# Allegro board SENTINEL_FALL_V01_02APR_2130.brd
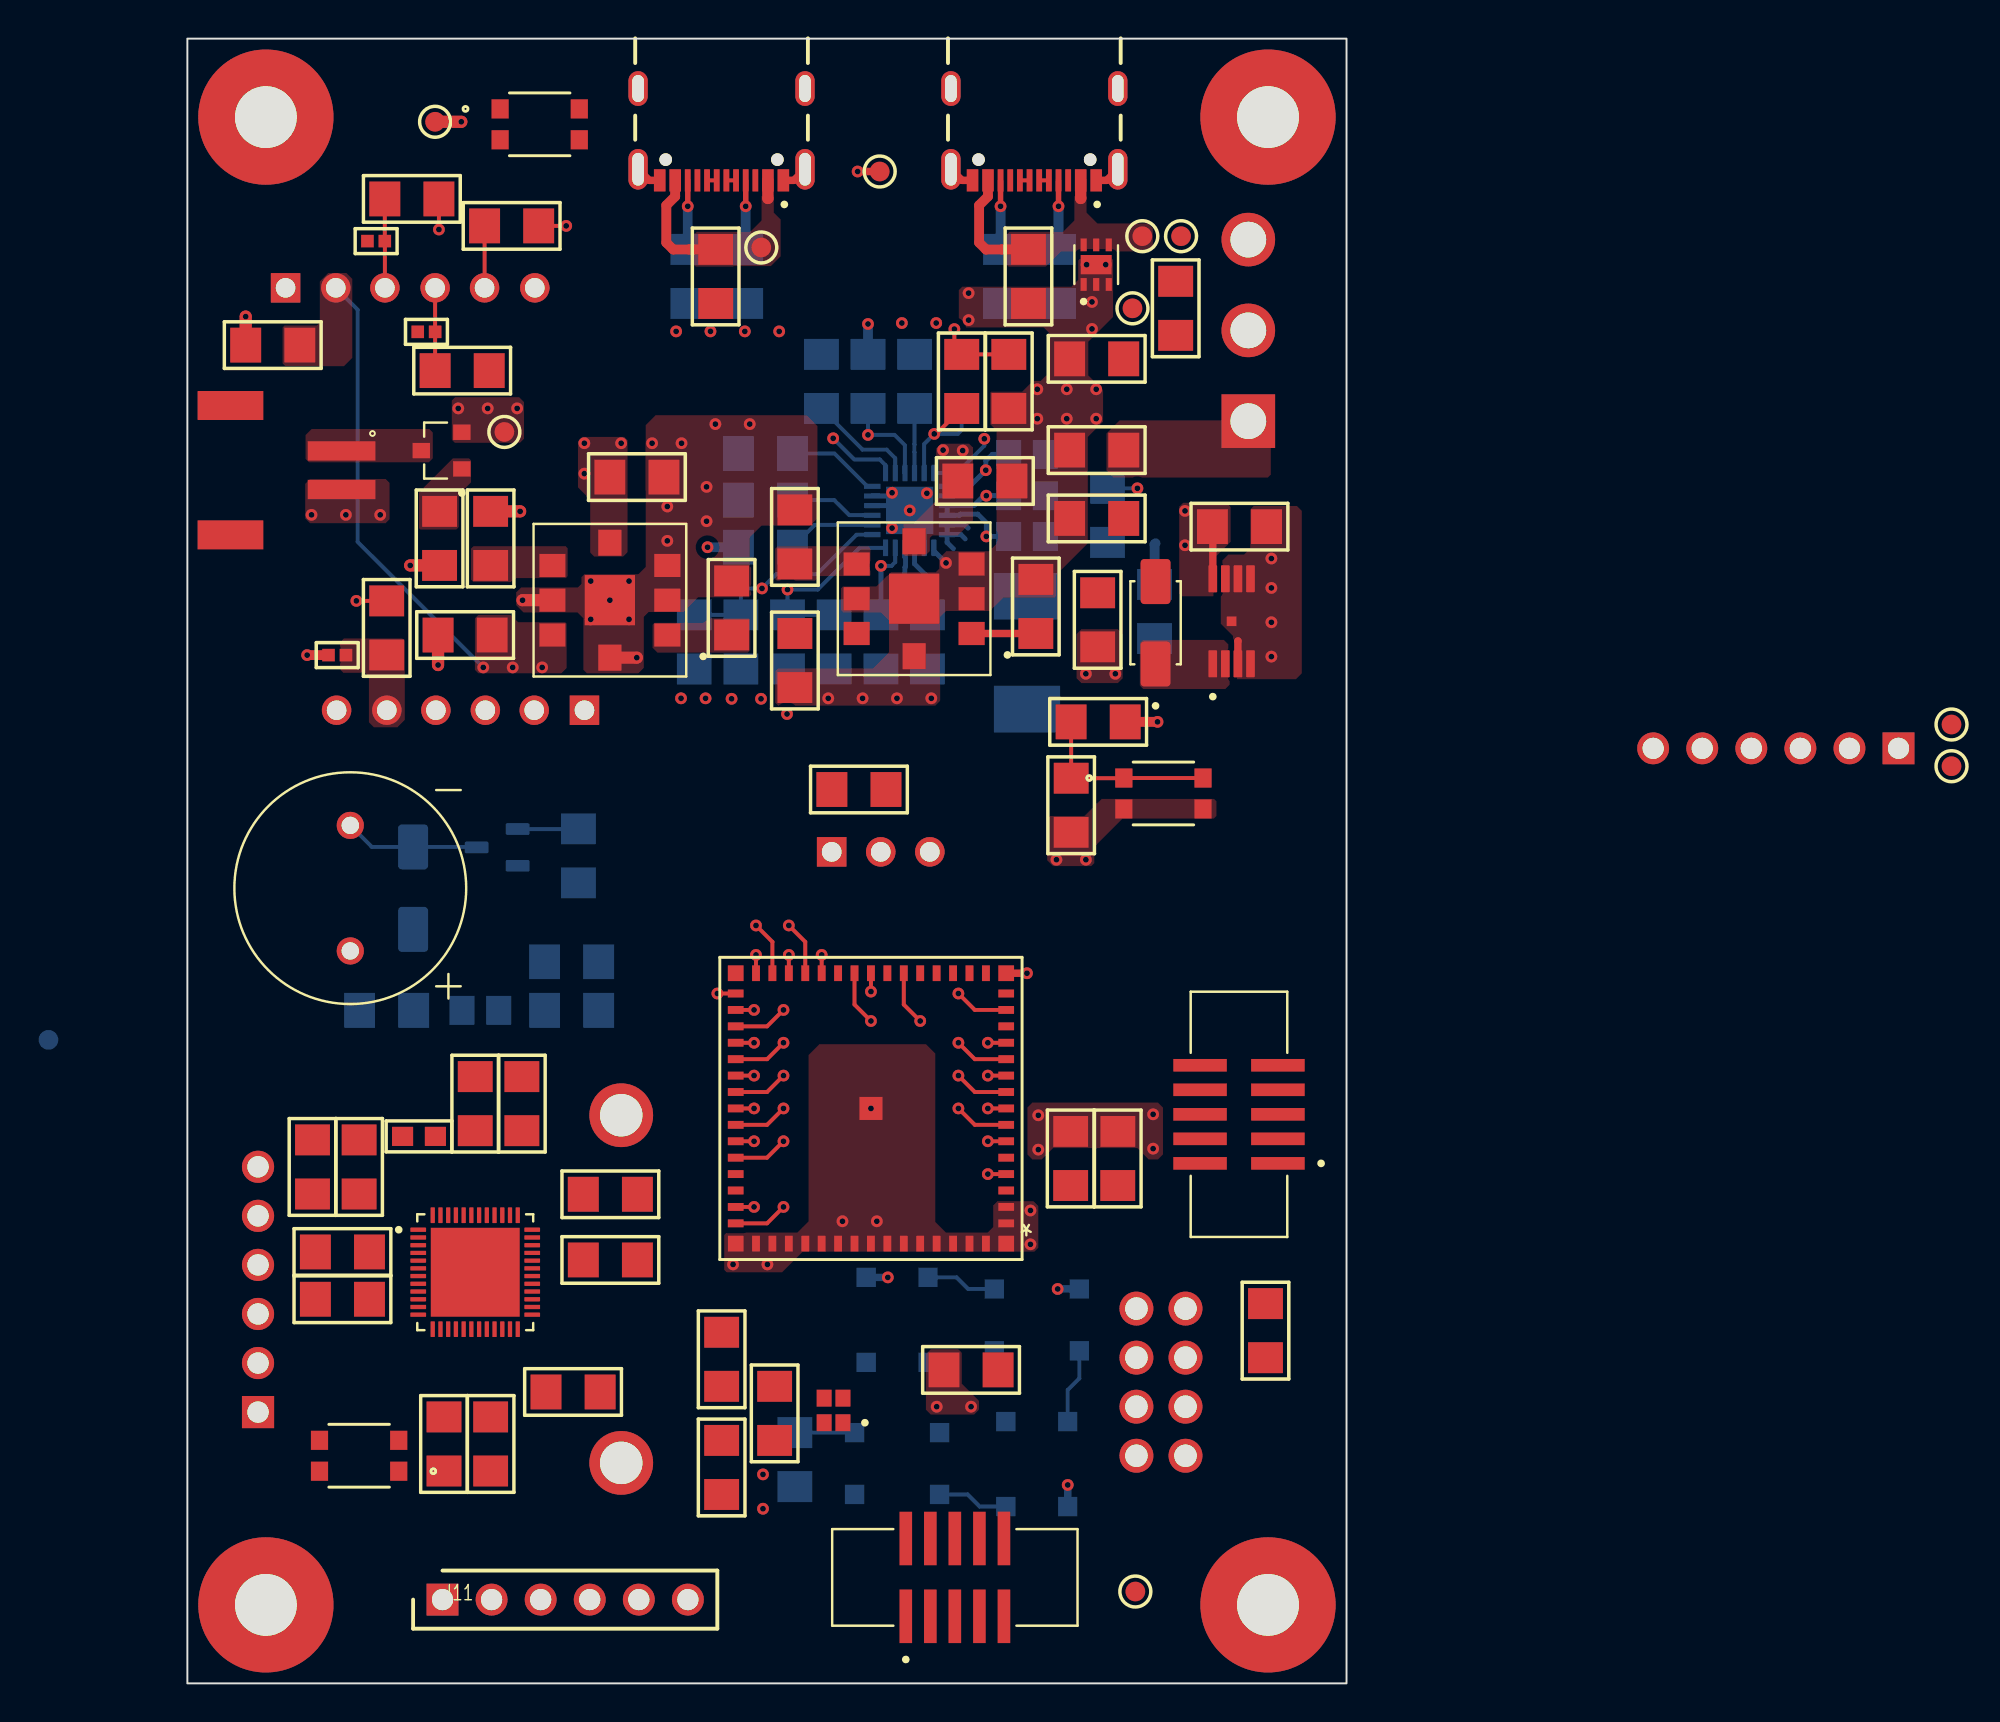
[diagram p0: board, top side]
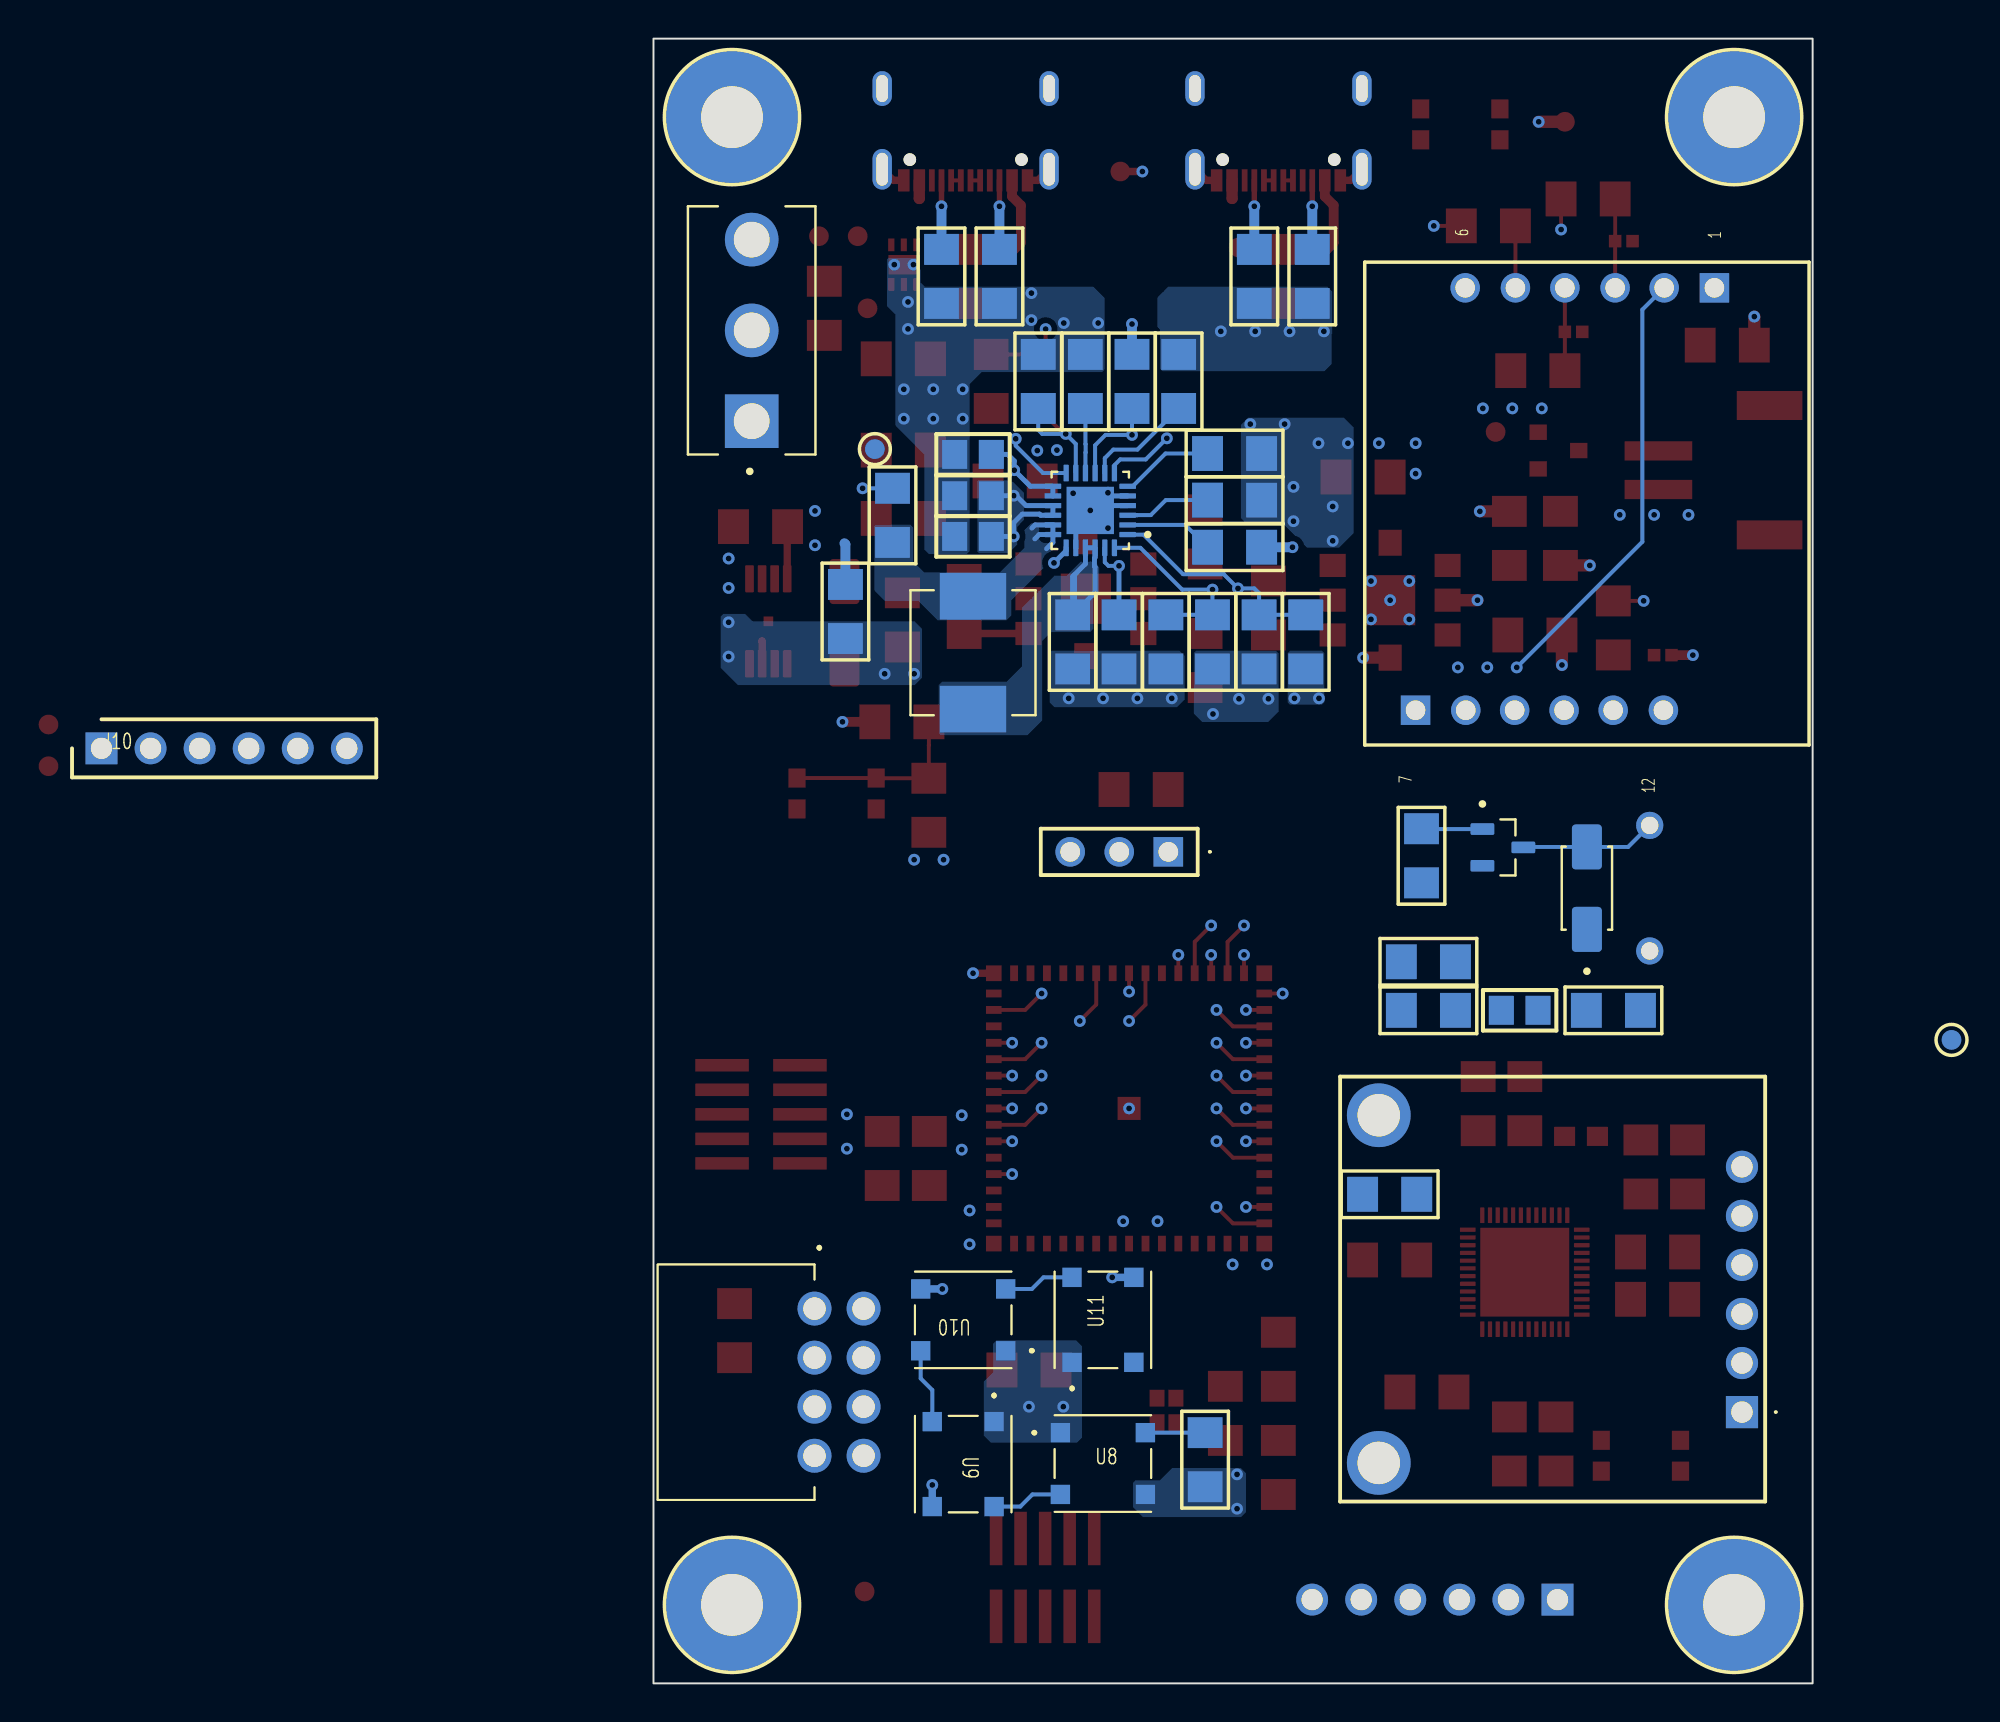
[diagram p1: board, bottom side, seen from below]

Outline 60 x 85.16 mm; copper layers: TOP, BOTTOM. Coordinates in mm from the lower left corner of the outline.
Outline path: rectangle 0,0 60,85.16

## Design rules (mm)
constraint set DEFAULT: min track width 0.203

## Placement (name value [footprint] x y rotation side)
C1  10uF  [C1206]  43.54 72.85 270 top
C2  1uF  [C1206]  35.9 53.92 270 bottom
C3  4.7uF  [C1206]  47.07 63.85 180 top
C4  10uF  [C1206]  38.3 53.92 90 bottom
C5  100nF  [C1206]  47.62 60.48 90 bottom
C6  4.7uF  [C1206]  47.07 68.58 180 top
C7  22uF  [C0805]  43.46 61.49 0 bottom
C8  22uF  [C0805]  43.46 59.39 0 bottom
C9  22uF  [C0805]  43.46 63.63 0 bottom
C10  4.7uF  [C1206]  40.08 67.41 90 bottom
C11  10uF  [C1206]  41.28 62.26 180 top
C12  10uF  [C1206]  23.27 62.46 180 top
C13  47uF  [C1206]  31.45 52.96 270 top
C14  47uF  [C1206]  14.38 54.28 180 top
C15  10uF  [C1206]  54.46 59.89 0 top
C16  100nF  [C1206]  50.06 55.5 270 bottom
C17  1uF  [C1206]  47.12 55.07 270 top
C18  10uF  [C1206]  45.72 27.18 270 top
C20  10uF  [C1206]  48.16 27.18 270 top
C21  10uF  [C1206]  4.42 69.29 0 top
C23  10uF  [C1206]  8.89 26.74 90 top
C24  10uF  [C1206]  19.96 15.09 0 top
C25  100nF  [C1206]  21.89 25.32 0 bottom
C26  100nF  [C1206]  6.48 26.74 90 top
C27  100nF  [C1206]  21.89 25.32 0 top
C28  100nF  [C1206]  8.03 19.89 180 top
C29  2.2uF  [C1206]  10.31 34.85 180 bottom
C30  100nF  [C1206]  13.28 12.4 90 top
C31  2.2uF  [C1206]  21.89 21.92 0 top
C32  10nF  [C1206]  19.89 37.36 0 bottom
C33  18pF  [C1206]  19.89 34.85 0 bottom
C35  18pF  [C1206]  27.65 11.18 270 top
C36  18pF  [C1206]  27.65 16.78 90 top
C37  10uF  [C1206]  27.34 72.85 270 top
C38  10uF  [C1206]  45.75 45.47 90 top
C39  10uF  [C1206]  47.07 60.32 0 top
C71  10uF  [C1206]  40.56 16.23 0 top
C72  10uF  [C1206]  34.76 46.28 180 top
D1  DIODE  [DIOM5226X230N]  50.11 54.91 90 top
D2  DIODE  [DIOM5226X230N]  11.68 41.17 90 bottom
FB1  120R, 0.2A  [F0805]  15.16 34.85 0 bottom
J1  USB4105-GF-A  [GCT_USB4105-GF-A]  43.84 82.58 180 top
J5  2X5 HDR JLINK  [CNC_3220-10-0300-00]  54.43 29.46 90 top
J6  2X5 HDR JLINK  [CNC_3220-10-0300-00]  39.73 5.49 0 top
J7  HEADER 2/SM_5  [JST_S2B-PH-SM4-TB]  7.98 62.81 90 top
J8  USB4105-GF-A  [GCT_USB4105-GF-A]  27.65 82.58 180 top
J9  1X3 HDR  [RS103G]  33.35 43.05 180 bottom
J10  PH1-06-UA  [HDRV6W64P0X254_1X6_1524X250X952P]  88.57 48.41 180 bottom
J11  PH1-06-UA  [HDRV6W64P0X254_1X6_1524X250X952P]  13.21 4.34 0 top
L1  1uH  [IND_IHLP2525CZER1R0M01]  43.46 53.37 90 bottom
L2  4.7uH  [L0603]  11.99 28.32 0 top
MOSFET2  SSM3J332R  [SOT95P240X88-3N]  13.16 63.83 90 top
NOREF  -  []  0 10.16 0 top
NOREF#2  -  []  60 0 90 top
R2  10K  [R1206]  42.09 72.85 270 bottom
R3  10K  [R1206]  45.09 72.85 270 bottom
R4  4K7  [R1206]  29.92 58.83 0 bottom
R5  4K7  [R1206]  35.23 67.41 270 bottom
R6  4K7  [R1206]  28.65 53.92 90 bottom
R7  4K7  [R1206]  31.06 53.92 90 bottom
R8  4K7  [R1206]  26.24 53.92 270 bottom
R9  4K7  [R1206]  33.48 53.92 270 bottom
R10  0R  [R1206]  32.82 67.41 90 bottom
R11  1M  [R1206]  29.92 63.68 180 bottom
R12  4K7  [R1206]  37.64 67.41 90 bottom
R13  0R  [R1206]  29.92 61.26 180 bottom
R14  10K  [R1206]  40.08 67.41 90 top
R15  10K  [R1206]  42.52 67.41 270 top
R16  4K7  [R1206]  31.45 59.36 90 top
R17  1.05K, 0p1%  [R1206]  43.92 55.76 90 top
R18  6.8K,0p1%  [R1206]  28.17 55.68 90 top
R19  4K7  [R1206]  15.7 59.28 90 top
R23  1K  [R1206]  31.45 11.58 270 bottom
R24  4K7  [R1206]  47.14 49.78 180 top
R26  100R  [R1206]  20.24 42.85 90 bottom
R27  4K7  [R1206]  15.7 12.4 270 top
R28  4K7  [R1206]  14.9 30.02 90 top
R29  4K7  [R1206]  17.31 30.02 90 top
R30  4K7  [R1206]  55.8 18.26 270 top
R31  1M  [R1206]  30.4 13.98 90 top
R32  10K  [R1206]  13.06 59.28 270 top
R33  10K  [R1206]  25.9 72.85 270 bottom
R34  10K  [R1206]  28.9 72.85 270 bottom
R35  4K7  [R1206]  8.03 22.34 180 top
R36  500m  [R1206]  51.16 71.2 90 top
R37  1K  [R1206]  16.78 75.46 180 top
R39  1K  [R1206]  14.22 67.97 180 top
R40  1K  [R1206]  11.62 76.86 0 top
R41  1K  [R1206]  10.32 54.65 90 top
R42  5k6  [R0402]  12.37 69.98 0 top
R43  5k6  [R0402]  9.77 74.68 0 top
R44  5k6  [R0402]  7.76 53.24 0 top
SW1  SW_1POLE_2CONT  [SW_500SSP1S2M2QEA]  54.91 70.05 90 bottom
SW5  -  [BD04AV]  51.66 19.41 270 bottom
SW6  SW_TC_SPST_1  [KMR221_CNK]  50.52 46.08 0 top
SW7  SW_TC_SPST_1  [KMR221_CNK]  18.24 80.72 0 top
SW8  SW_TC_SPST_1  [KMR221_CNK]  8.89 11.79 180 top
TP2  TEST POINT_2  [TP40]  49.43 74.93 0 top
TP3  TEST POINT_2  [TP40]  48.54 63.91 0 bottom
TP4  TEST POINT_2  [TP40]  12.82 80.85 0 top
TP6  T POINT R  [MH7P5_3P2T]  4.06 81.1 0 top
TP12  TEST POINT_2  [TP40]  16.41 64.8 0 top
TP13  TEST POINT_2  [TP40]  29.71 74.35 0 top
TP14  TEST POINT_2  [TP40]  -7.19 33.32 0 bottom
TP15  TEST POINT_2  [TP40]  49.07 4.76 0 top
TP16  TEST POINT_2  [TP40]  35.83 78.28 0 top
TP17  T POINT R  [MH7P5_3P2T]  4.06 4.06 0 top
TP18  T POINT R  [MH7P5_3P2T]  55.93 81.1 0 top
TP19  T POINT R  [MH7P5_3P2T]  55.93 4.06 0 top
TP20  TEST POINT_2  [TP40]  48.92 71.2 0 top
TP21  TEST POINT_2  [TP40]  51.43 74.93 0 top
TP22  T POINT R  [TP40]  91.31 47.49 0 top
TP23  T POINT R  [TP40]  91.31 49.65 0 top
U1  TVS DIODE  [SON65P200X200X80-7N]  47.04 73.46 90 top
U2  BQ25886RGE  [QFN50P400X400X100-25N]  37.39 60.73 0 bottom
U3  MYLSM00502ERPL  [MURATA_MYLSM00502ERPL]  37.62 56.16 180 top
U4  MYLSM00502ERPL  [MURATA_MYLSM00502ERPL]  21.87 56.08 180 top
U5  TPS7B8225QDGNRQ1  [SOP65P490X110-9N]  54.05 54.99 90 top
U6  ESP32-S3-MINI  [ESP32-S3-MINI-1U_EXP]  35.38 29.77 180 top
U7  -  [SIM8000L]  17.98 50.39 90 bottom
U8  IN-PI55QATPRPGPBPW-40  [INPI55QATPRPGPBPW30]  36.74 11.38 180 bottom
U9  IN-PI55QATPRPGPBPW-40  [INPI55QATPRPGPBPW30]  43.97 11.35 270 bottom
U10  IN-PI55QATPRPGPBPW-40  [INPI55QATPRPGPBPW30]  43.97 18.82 0 bottom
U11  IN-PI55QATPRPGPBPW-40  [INPI55QATPRPGPBPW30]  36.74 18.82 90 bottom
U12  BC818-40LT1G  [SOT95P237X111-3N]  16.03 43.28 180 bottom
U13  AT-1224-TWT-5V-2-R  [XDCR_AT-1224-TWT-5V-2-R]  8.43 41.17 180 top
U14  NRF54L15-QFAA-R  [QFN40P600X600X90-49N]  14.9 21.29 0 top
U*  -  [unnamed#2]  3.66 14.05 0 bottom
X1  32 MHz  [XTAL_ABM11W-330000MHZ-8-D1X-T3]  33.45 14.13 180 top

## Library data of the parts
C1 C37 = CAP_CER_10uF_50V_1206_X7R_10P
C2 C17 = CAP_1UF_25V_1206_10P0
C3 C6 C10 = CAP_CER_4700nF_50V_X7R_1206
C4 C11 C12 C15 C18 C20 C21 C23 C24 C38 C39 C71 C72 = CAP_10UF_50V X7T_1206
C5 = CAP_100nF_16V_1206_10P0
C7-C9 = 4_CAP_ 22uF 20% X5R_0805 35VDC
C13 C14 = CAP_CER_47UF_16V_X5R_1206
C16 C25-C28 C30 = CAP_100nF_50V_1206_X7R
C29 C31 = CAP_CER_2.2UF_16V_X7R_1206
C32 = 7_CAP_10nF_10p_50V
C33 C35 C36 = CAP_18PF_125V_1206
D1 D2 = B260A-13-F
FB1 = FB_120R_200mA_0805
J1 J8 = CONN_USB_USB4105-GF-A
J5 J6 = HEADER_10_2X5_SHROUDED
J7 = HEADER 2/SM_5
J9 = HEADER_3_3X1_FEMALE
J10 J11 = HEADER_6_6X1_MALE
L1 = IND_1uH_11A_1_ukpkg
L2 = IND_4.7UH_350MA_500MOHM_SM
MOSFET2 = SSM3J332R,LF
R2 R3 R14 R15 R32-R34 = RES_10K_1W4_1P0_1206
R4-R9 R12 R16 R19 R24 R27-R30 R35 = RES_4K7_1W4_1P0_1206
R10 R13 = RES_0R0_1W4_1P0_1206
R11 R31 = RES_1M_1W2_0P1_1206
R17 = RES_1P05K_0W52_0P1_1206
R18 = RES_6P8K_1W4_0P1_1206
R23 R37 R39-R41 = RES_1K_1W4_1P0_1206
R26 = RES_100R_1W8_1P0_1206
R36 = RES_500mOHM_1W2_1P0_1206
R42-R44 = RES_GENRIC_5k6_1W4_1P0_1206
SW1 = 500SSP1S2M2QEA
SW5 = SWITH_DIP
SW6-SW8 = SW_TC_SPST_1: User Part Number: PN; Tolerance: TOL
TP2-TP4 TP12-TP16 TP20 TP21 = TEST POINT_2
TP6 TP17-TP19 TP22 TP23 = T POINT R
U1 = IC_TVS_DIODE
U2 = BQ25886RGER
U3 U4 = MYLSM00502ERPL
U5 = TPS7B8225QDGNRQ1
U6 = ESP32-S3-MINI: User Part Number: PN; Tolerance: TOL
U7 = SIP_IC_SIM800L_0
U8-U11 = IN-PI55QATPRPGPBPW-40
U12 = NPN_TRANSISTOR_BC818-40LT1G
U13 = BUZZER_AT-1224-TWT-5V-2-R
U14 = NRF54L15-QFAA-R
X1 = XTAL_32MHZ

## Footprints (pads in the part's own frame, mm; a bottom-side part is the same pattern mirrored in y, then rotated)
BD04AV
  round 1.755 hole 1.17: 1(0,0) 2(2.54,0) 3(5.08,0) 4(7.62,0) 5(7.62,2.54) 6(5.08,2.54) 7(2.54,2.54) 8(0,2.54)
C0805
  rect 1.295x1.499 smd: 1(-0.95,0) 2(0.95,0)
C1206
  rect 1.6x1.803 smd: 1(-1.4,0) 2(1.4,0)
CNC_3220-10-0300-00
  rect 0.65x2.77 smd: 1(-2.54,-2.015) 2(-2.54,2.015) 3(-1.27,-2.015) 4(-1.27,2.015) 5(0,-2.015) 6(0,2.015) 7(1.27,-2.015) 8(1.27,2.015) 9(2.54,-2.015) 10(2.54,2.015)
DIOM5226X230N
  custom 2.33x1.55 smd: 1(-2.135,0) 2(2.135,0)
ESP32-S3-MINI-1U_EXP
  rect 0.813x0.406 smd: 1(-7,5.95) 2(-7,5.1) 3(-7,4.25) 4(-7,3.4) 5(-7,2.55) 6(-7,1.7) 7(-7,0.85) 8(-7,0) 9(-7,-0.85) 10(-7,-1.7) 11(-7,-2.55) 12(-7,-3.4) 13(-7,-4.25) 14(-7,-5.1) 15(-7,-5.95) 31(7,-5.95) 32(7,-5.1) 33(7,-4.25) 34(7,-3.4) 35(7,-2.55) 36(7,-1.7) 37(7,-0.85) 38(7,0) 39(7,0.85) 40(7,1.7) 41(7,2.55) 42(7,3.4) 43(7,4.25) 44(7,5.1) 45(7,5.95)
  rect 0.406x0.813 smd: 16(-5.95,-7) 17(-5.1,-7) 18(-4.25,-7) 19(-3.4,-7) 20(-2.55,-7) 21(-1.7,-7) 22(-0.85,-7) 23(0,-7) 24(0.85,-7) 25(1.7,-7) 26(2.55,-7) 27(3.4,-7) 28(4.25,-7) 29(5.1,-7) 30(5.95,-7) 46(5.95,7) 47(5.1,7) 48(4.25,7) 49(3.4,7) 50(2.55,7) 51(1.7,7) 52(0.85,7) 53(0,7) 54(-0.85,7) 55(-1.7,7) 56(-2.55,7) 57(-3.4,7) 58(-4.25,7) 59(-5.1,7) 60(-5.95,7)
  rect 1.194x1.194 smd: 61(0,0)
  rect 0.813x0.813 smd: 62(-7,7) 63(-7,-7) 64(7,-7) 65(7,7)
F0805
  rect 1.295x1.499 smd: 1(-0.95,0) 2(0.95,0)
GCT_USB4105-GF-A
  round 0.65 hole 0.65 unplated: (-2.89,3.68) (2.89,3.68)
  rect 0.6x1.15 smd: A1B12(-3.2,4.755) A4B9(-2.4,4.755) B1A12(3.2,4.755) B4A9(2.4,4.755)
  rect 0.3x1.15 smd: A5(-1.25,4.755) A6(-0.25,4.755) A7(0.25,4.755) A8(1.25,4.755) B5(1.75,4.755) B6(0.75,4.755) B7(-0.75,4.755) B8(-1.75,4.755)
  oval 1x2.1 hole 0.6x1.7: S1(-4.32,4.18) S2(4.32,4.18)
  oval 1x1.8 hole 0.6x1.4: S3(-4.32,0) S4(4.32,0)
HDRV6W64P0X254_1X6_1524X250X952P
  rect 1.65x1.65 hole 1.1: 1(0,0)
  round 1.65 hole 1.1: 2(2.54,0) 3(5.08,0) 4(7.62,0) 5(10.16,0) 6(12.7,0)
IND_IHLP2525CZER1R0M01
  rect 2.413x3.429 smd: 1(-2.921,0) 2(2.921,0)
INPI55QATPRPGPBPW30
  rect 1x1 smd: 1(-2.2,1.6) 2(-2.2,-1.6) 3(2.2,-1.6) 4(2.2,1.6)
JST_S2B-PH-SM4-TB
  rect 1.5x3.4 smd: (-3.35,5.75) (3.35,5.75)
  rect 1x3.5 smd: 1(1,0) 2(-1,0)
KMR221_CNK
  rect 0.889x0.991 smd: 1(-2.05,0.8) 2(-2.05,-0.8) 3(2.05,-0.8) 4(2.05,0.8)
L0603
  rect 1.092x0.991 smd: 1(-0.85,0) 2(0.85,0)
MH7P5_3P2T
  round 7 hole 3.2: 1(0,0)
MURATA_MYLSM00502ERPL
  rect 1.35x1.2 smd: 1(-2.975,1.8) 2(-2.975,0) 3(-2.975,-1.8) 5(2.975,-1.8) 6(2.975,0) 7(2.975,1.8)
  rect 1.2x1.35 smd: 4(0,-2.975) 8(0,2.975)
  rect 2.6x2.6 smd: 9(0,0)
QFN40P600X600X90-49N
  custom 0.81x0.22 smd: 1(-2.95,2.2) 2(-2.95,1.8) 3(-2.95,1.4) 4(-2.95,1) 5(-2.95,0.6) 6(-2.95,0.2) 7(-2.95,-0.2) 8(-2.95,-0.6) 9(-2.95,-1) 10(-2.95,-1.4) 11(-2.95,-1.8) 12(-2.95,-2.2) 25(2.95,-2.2) 26(2.95,-1.8) 27(2.95,-1.4) 28(2.95,-1) 29(2.95,-0.6) 30(2.95,-0.2) 31(2.95,0.2) 32(2.95,0.6) 33(2.95,1) 34(2.95,1.4) 35(2.95,1.8) 36(2.95,2.2)
  custom 0.22x0.81 smd: 13(-2.2,-2.95) 14(-1.8,-2.95) 15(-1.4,-2.95) 16(-1,-2.95) 17(-0.6,-2.95) 18(-0.2,-2.95) 19(0.2,-2.95) 20(0.6,-2.95) 21(1,-2.95) 22(1.4,-2.95) 23(1.8,-2.95) 24(2.2,-2.95) 37(2.2,2.95) 38(1.8,2.95) 39(1.4,2.95) 40(1,2.95) 41(0.6,2.95) 42(0.2,2.95) 43(-0.2,2.95) 44(-0.6,2.95) 45(-1,2.95) 46(-1.4,2.95) 47(-1.8,2.95) 48(-2.2,2.95)
  rect 4.6x4.6 smd: 49(0,0)
QFN50P400X400X100-25N
  custom 0.86x0.27 smd: 1(-1.935,1.25) 2(-1.935,0.75) 3(-1.935,0.25) 4(-1.935,-0.25) 5(-1.935,-0.75) 6(-1.935,-1.25) 13(1.935,-1.25) 14(1.935,-0.75) 15(1.935,-0.25) 16(1.935,0.25) 17(1.935,0.75) 18(1.935,1.25)
  custom 0.27x0.86 smd: 7(-1.25,-1.935) 8(-0.75,-1.935) 9(-0.25,-1.935) 10(0.25,-1.935) 11(0.75,-1.935) 12(1.25,-1.935) 19(1.25,1.935) 20(0.75,1.935) 21(0.25,1.935) 22(-0.25,1.935) 23(-0.75,1.935) 24(-1.25,1.935)
  rect 2.45x2.45 smd: 25(0,0)
R0402
  rect 0.65x0.65 smd: 1(-0.45,0) 2(0.45,0)
R1206
  rect 1.6x1.803 smd: 1(-1.4,0) 2(1.4,0)
RS103G
  rect 1.53x1.53 hole 1.02: 1(0,0)
  round 1.53 hole 1.02: 2(-2.54,0) 3(-5.08,0)
SIM8000L
  rect 1.524x1.524 hole 1.016: 1(21.87,-12.9) 7(0,2.57)
  round 1.524 hole 1.016: 2(21.87,-10.3) 3(21.87,-7.76) 4(21.87,-5.16) 5(21.87,-2.6) 6(21.87,0) 8(0,-0.03) 9(0,-2.56) 10(0,-5.12) 11(0,-7.66) 12(0,-10.26)
SON65P200X200X80-7N
  rect 0.66x0.32 smd: 1(-1.025,0.65) 2(-1.025,0) 3(-1.025,-0.65) 4(1.025,-0.65) 5(1.025,0) 6(1.025,0.65)
  rect 1x1.6 smd: 7(0,0)
SOP65P490X110-9N
  custom 1.4x0.45 smd: 1(-2.2,0.975) 2(-2.2,0.325) 3(-2.2,-0.325) 4(-2.2,-0.975) 5(2.2,-0.975) 6(2.2,-0.325) 7(2.2,0.325) 8(2.2,0.975)
  rect 0.5x0.5 smd: 9(0,0)
SOT95P237X111-3N
  custom 1.23x0.6 smd: 1(-1.06,0.95) 2(-1.06,-0.95) 3(1.06,0)
SOT95P240X88-3N
  rect 0.8x0.9 smd: 1(-0.95,-1.05) 2(0.95,-1.05) 3(0,1.05)
SW_500SSP1S2M2QEA
  rect 2.775x2.775 hole 1.85: 1(-4.7,0)
  round 2.775 hole 1.85: 2(0,0) 3(4.7,0)
TP40
  round 1.02 smd: 1(0,0)
unnamed#2
  rect 1.665x1.665 hole 1.11: 1(0,0)
  round 1.665 hole 1.11: 2(0,-2.54) 3(0,-5.08) 4(0,-7.62) 5(0,-10.16) 6(0,-12.7)
  round 3.3 hole 2.2: 7(18.8,-15.37) 8(18.8,2.63)
XDCR_AT-1224-TWT-5V-2-R
  round 1.408 hole 0.9: 1(0,3.25) 2(0,-3.25)
XTAL_ABM11W-330000MHZ-8-D1X-T3
  rect 0.775x0.875 smd: 1(-0.487,0.637) 2(-0.487,-0.637) 3(0.487,-0.637) 4(0.487,0.637)

## Nets
GND: C1.2 C2.2 C3.2 C4.1 C6.2 C7.2 C8.2 C9.2 C10.2 C11.1 C12.1 C13.2 C14.2 C15.2 C16.2 C17.2 C18.1 C20.1 C21.1 C23.2 C24.2 C25.2 C26.2 C27.2 C28.2 C29.2 C30.2 C31.2 C32.2 C33.2 C35.2 C36.2 C37.2 C38.1 C39.1 C71.2 C72.1 J1.A1B12 J1.B1A12 J1.S1 J1.S2 J1.S3 J1.S4 J5.9 J5.10 J6.3 J6.5 J6.9 J7.2 J8.A1B12 J8.B1A12 J8.S1 J8.S2 J8.S3 J8.S4 J9.3 J10.2 J11.3 J11.4 R2.2 R3.2 R8.2 R9.2 R10.2 R11.2 R12.2 R13.2 R15.2 R16.2 R17.2 R18.2 R19.2 R23.2 R32.2 R33.2 R34.2 R35.2 R42.1 R43.1 R44.1 SW6.2 SW6.3 SW7.1 SW7.4 SW8.2 SW8.3 TP4.1 TP6.1(TP) TP14.1 TP15.1 TP16.1 TP17.1(TP) TP18.1(TP) TP19.1(TP) TP22.1(TP) TP23.1(TP) U1.1 U1.2 U1.3 U1.7 U2.4 U2.5 U2.19 U2.20 U2.25 U3.2 U3.3 U3.6 U3.8 U3.9 U4.2 U4.3 U4.6 U4.8 U4.9 U5.3 U5.4 U5.5 U5.6 U5.7 U5.9(PAD) U6.1 U6.2 U6.42 U6.43 U6.46 U6.47 U6.48 U6.49 U6.50 U6.51 U6.52 U6.53 U6.54 U6.55 U6.56 U6.57 U6.58 U6.59 U6.60 U6.61 U6.62 U6.63 U6.64 U6.65 U7.6 U8.3(VSS) U9.3(VSS) U10.3(VSS) U11.3(VSS) U12.2(EMITTER) U14.32 U14.44 U14.49 X1.2 X1.4
VBAT: C9.1 MOSFET2.2(SOURCE) TP12.1 U2.13 U2.14
VBUS: C1.1 C2.1 J1.A4B9 J1.B4A9(VBUS02) R6.1 R7.1 TP2.1 U1.4 U1.5(IN_3) U1.6 U2.23
VBUS_USB2: C37.1 J8.A4B9 J8.B4A9(VBUS02) TP13.1
BLE_OFF: SW5.6 U14.14
CC1: J1.A5 J8.A5 R3.1 R34.1
CC2: J1.B5 J8.B5 R2.1 R33.1
ESP_BOOT0: SW7.2 SW7.3
ESP_BOOT0_USB: U6.4 U6.44
ESP_BUZZER_OP: R26.1 U6.36
ESP_DEBG_RXD0: J11.6 U6.40
ESP_DEBG_TXD0: J11.5 U6.39(TXD0)
ESP_EN_4V0: R19.1 U4.5 U6.41
ESP_EN_5V0: R16.1 U3.5 U6.25
ESP_GPIO3_RADAR: J10.5 U6.9
ESP_GPIO4_RADAR: J10.6 U6.10
ESP_NRF_GPIO1_BLEALERT: J5.7 R35.1 U6.27 U14.7
ESP_NRF_GPIO2: U6.26 U14.6
ESP_NRF_RESET: C30.1 J5.5 J6.10 R27.2 SW8.1 SW8.4 U6.21
ESP_PG_N: R5.2 U2.9 U6.37
ESP_PIR_SENSE: J9.2 U6.14
ESP_RESET: C38.2 R24.2 SW6.1 SW6.4 U6.45
ESP_SIM_DTR: R41.2 U6.7
ESP_SIM_RST: R40.2 U6.6
ESP_SMART_LED_OP: R23.1 U6.35 U8.4
ESP_STAT: R4.2 U2.2 U6.38
ESP_UART1_RXD: J10.3 U6.20
ESP_UART1_TXD: J10.4 U6.19
ESP_UART2_RXD: R37.1 U6.28
ESP_UART2_TXD: R39.1 U6.29
ESP_WIFI_OFF: U6.30 U6.31 U6.32
GSM_OFF: SW5.8 U6.17
I2C_SCL: J11.1 R28.1 U6.34 U14.42
I2C_SDA: J11.2 R29.1 U6.33 U14.38
LED_BUZZER_OFF: SW5.7(NO3) U6.16
NRF_GPIO1: J6.6 U14.13
NRF_RXD: J5.4 U14.23
NRF_SWDCLK: J5.8 J6.4 U6.12 U14.26
NRF_SWDIO: J5.6 J6.2 U6.11 U14.25
NRF_TXD: J5.3 U14.24
NRF_XTAL1: C35.1 R31.1 U14.34 X1.1
NRF_XTAL2: C36.1 R31.2 U14.35(XC2) X1.3(XTAL2)
PGM_D+: J8.A6 J8.B7 U6.24
PGM_D-: J8.A7 J8.B6 U6.23
POWER_D+: J1.A6 J1.B7 R7.2 R9.1 U2.24
POWER_D-: J1.A7 J1.B6 R6.2 R8.1 U2.1
VLDO_3V3: C15.1 C18.2 C20.2 C23.1 C24.1 C25.1 C26.1 C27.1 C28.1 C72.2 J5.1 J5.2 J6.1 J9.1 R24.1 R28.2 R29.2 R30.1 U5.8 U6.3 U14.10 U14.22 U14.36 U14.47 U14.48
VREGN_DIV: R14.2 R15.1 U2.7
VSW_3V3: R4.1 R5.1
VSW_4V0: C14.1 C21.2 U4.7(VO) U7.2(VCC)
VSW_5V0: C13.1 C71.1 D2.1 J10.1 U3.7(VO) U8.1 U9.1 U10.1 U11.1 U13.1
VSYS: C11.2 C12.2 C16.1 C17.1 C39.2 D1.2 R36.2 TP21.1 U3.4 U4.4
VSYS_BC: C3.1 C7.1 C8.1 SW1.1 TP3.1 U2.15 U2.16
WIFI_OFF: SW5.5 U6.15
N489525: C4.2 L1.1 U2.21 U2.22
N489966: C5.1 L1.2 U2.17 U2.18
N490283: C5.2 U2.12
N491328: R10.1 U2.8
N491337: R11.1 U2.6(VSET)
N491346: R12.1 U2.10
N491858: C10.1 R14.1 U2.11
N492759: R13.1 U2.3
N503956: D1.1 U5.1 U5.2
N505816: R18.1 U4.1
N505904: R17.1 U3.1
N533307: U8.2 U9.4
N533315: U9.2 U10.4
N536197: U10.2 U11.4
N548982: L2.1 U14.46
N549115: C29.1 FB1.1 L2.2 U14.45
N549518: C31.1 C32.1 C33.1 FB1.2 U14.33 U14.43
N550099: R27.1 U14.30
N569514: C6.1 R36.1 SW1.2 TP20.1
N570476: R30.2 SW5.1 SW5.2 SW5.3 SW5.4
N633379: MOSFET2.1 R32.1
N633403: J7.1(PWR) MOSFET2.3
N742009: D2.2 U12.3 U13.2
N742588: R26.2 U12.1
N763037: R37.2 U7.5
N763041: R39.2 R42.2 U7.4
N763585: R40.1 R43.2 U7.3
N763595: R41.1 R44.2 U7.11

Pads without a net: J1 A8 B8; J6 7 8; J8 A8 B8; SW1 3; U6 5 8 13 18 22; U7 1 7 8 9 10 12; U11 2; U14 1 2 3 4 5 8 9 11 12 15 16 17 18 19 20 21 27 28 29 31 37 39 40 41; U* 1 2 3 4 5 6 7 8

## Via types
v1: diameter 0.61, hole 0.305, TOP to BOTTOM, 149 vias

## Routing (per net, layer and track width the routed paths; a pad name or vN(x,y) marks a point on that pad's centre or on a via; arc(x,y) is an arc through that point)
GND: length 30.1
  TOP w0.381: J1.S2 40.1,77.82 J1.B1A12 ; J8.S2 23.9,77.82 J8.B1A12 ; TP16.1 v1(34.69,78.28) ; 54.38,53.97 54.38,53.97 U5.3 ; v1(43.46,36.77) U6.63 ; J8.S1 31.39,77.82 J8.A1B12 ; J1.A1B12 47.59,77.82 J1.S1
  TOP w0.508: R44.1 v1(6.2,53.24)
  TOP w0.635: C14.2 v1(12.98,52.73) ; TP4.1 v1(14.18,80.85) ; R32.2 v1(11.53,57.88) ; U4.6 v1(17.35,56.08) ; U4.8 v1(23.26,53.11) ; R19.2 v1(17.22,60.68) ; C21.1 v1(3.02,70.77)
  BOTTOM w0.254: U2.5 36.31,61.48 v1(36.47,61.65) ; U2.19 38.64,58.64 v1(39.27,58.01) ; U2.20 38.14,59.98 v1(37.39,60.73) 37.14,60.98 U2.4
  BOTTOM w0.381: U10.3 v1(45.05,20.42) ; U9.3 v1(45.57,10.27) ; U11.3 v1(36.26,21.02)
  vias: v1(6.43,60.5) v1(8.2,60.5) v1(9.98,60.5) v1(20.88,57.07) v1(20.88,55.09) v1(21.87,56.08) v1(22.86,57.07) v1(22.86,55.09) v1(24.05,64.21) v1(24.84,60.93) v1(24.84,59.16) v1(25.3,70) v1(25.58,64.21) v1(25.55,51) v1(26.82,51) v1(26.87,61.95) v1(26.87,60.17) v1(27.08,70) v1(27.33,65.2) v1(28.24,21.69) v1(28.85,70) v1(29.11,65.2) v1(29.79,10.82) v1(29.79,9.04) v1(30.02,21.69) v1(30.63,70) v1(33.17,51) v1(33.91,23.93) v1(34.95,51) v1(35.38,29.77) v1(35.69,23.93) v1(36.47,59.82) v1(36.73,51) v1(36.98,70.43) v1(38.28,61.62) v1(38.51,51) v1(38.76,70.43) v1(40.44,71.98) v1(40.44,70.59) v1(43.64,24.49) v1(43.64,22.73) v1(43.99,67.01) v1(43.99,65.48) v1(44.04,29.41) v1(44.04,27.64) v1(44.98,42.65) v1(45.52,67.01) v1(45.52,65.48) v1(46.54,73.46) v1(46.51,52.27) v1(46.51,42.65) v1(46.82,71.53) v1(46.82,70.13) v1(47.04,67.01) v1(47.04,65.48) v1(47.53,73.46) v1(48.03,52.27) v1(49.99,29.46) v1(49.99,27.69) v1(56.11,58.24) v1(56.11,56.72) v1(56.11,54.94) v1(56.11,53.16)
VBAT: length 4.7
  BOTTOM w0.254: C9.1 41.66,63.63 41.33,63.3 v1(41.33,62.81) 40.49,61.98 U2.13 U2.14
  vias: v1(14.02,66.01) v1(15.54,66.01) v1(17.07,66.01)
VBUS: length 11.1
  TOP w0.508: J1.B4A9 41.44,76.99 40.98,76.53 40.98,74.6 41.34,74.24 42.17,74.24 42.18,74.25 C1.1
  TOP w0.584: 46.24,76.89 46.24,76.89 J1.A4B9
  BOTTOM w0.203: v1(35.9,57.86) 36.45,57.86 36.64,58.05 U2.23
  BOTTOM w0.254: v1(35.9,57.86) C2.1
  vias: v1(28.17,50.98) v1(29.69,50.98) v1(31.04,50.19)
VBUS_USB2: length 7.1
  TOP w0.508: C37.1 25.99,74.25 25.98,74.24 25.15,74.24 24.79,74.6 24.79,76.53 25.25,76.99 J8.B4A9
  TOP w0.584: 30.05,76.89 30.05,76.89 J8.A4B9
CC1: length 7.1
  TOP w0.279: J1.A5 v1(45.09,76.48) ; J8.A5 v1(28.9,76.48)
  BOTTOM w0.508: R3.1 v1(45.09,76.48) ; R34.1 v1(28.9,76.48)
CC2: length 7.1
  TOP w0.279: J8.B5 v1(25.9,76.48) ; J1.B5 v1(42.09,76.48)
  BOTTOM w0.508: R2.1 v1(42.09,76.48) ; R33.1 v1(25.9,76.48)
ESP_BOOT0_USB: length 1.9
  TOP w0.203: U6.4 v1(41.43,26.37) ; U6.44 v1(29.33,24.67)
ESP_BUZZER_OP: length 0.9
  TOP w0.203: U6.36 v1(29.33,31.47)
ESP_DEBG_RXD0: length 0.9
  TOP w0.203: U6.40 v1(29.33,28.07)
ESP_DEBG_TXD0: length 2.8
  TOP w0.203: v1(30.86,29.77) 30.01,28.92 U6.39
ESP_EN_4V0: length 2.8
  TOP w0.203: v1(30.86,28.07) 30.01,27.22 U6.41
ESP_GPIO3_RADAR: length 2.8
  TOP w0.203: U6.9 40.76,30.62 v1(39.91,31.47)
ESP_GPIO4_RADAR: length 0.9
  TOP w0.203: U6.10 v1(41.43,31.47)
ESP_NRF_GPIO1_BLEALERT: length 2.8
  TOP w0.203: v1(31.13,39.24) 31.98,38.39 U6.27
ESP_NRF_GPIO2: length 0.9
  TOP w0.203: v1(32.83,37.72) U6.26
ESP_NRF_RESET: length 2.8
  TOP w0.203: v1(37.93,34.3) 37.08,35.15 U6.21
ESP_PG_N: length 7.8
  TOP w0.203: U6.37 30.01,30.62 v1(30.86,31.47)
  BOTTOM w0.203: U2.9 37.14,64.1 36.6,64.64 v1(35.23,64.64) R5.2
ESP_PIR_SENSE: length 2.8
  TOP w0.203: U6.14 40.76,34.87 v1(39.91,35.72)
ESP_RESET: length 12.6
  TOP w0.203: v1(30.86,24.67) 30.01,23.82 U6.45 ; R24.2 45.74,48.58 45.75,48.57 C38.2 48.46,46.87 SW6.1 SW6.4
ESP_SIM_DTR: length 4.4
  TOP w0.203: R41.2 v1(8.75,56.05) ; v1(39.91,29.77) 40.76,28.92 U6.7
ESP_SIM_RST: length 2.5
  TOP w0.203: R40.2 v1(13.02,75.28) ; U6.6 v1(41.43,28.07)
ESP_SMART_LED_OP: length 5.9
  TOP w0.203: U6.35 30.01,32.32 v1(30.86,33.17)
  BOTTOM w0.203: R23.1 U8.4
ESP_STAT: length 5.6
  TOP w0.203: U6.38 v1(29.33,29.77)
  BOTTOM w0.203: R4.2 32.48,59.98 U2.2
ESP_UART2_RXD: length 2.4
  TOP w0.203: v1(31.13,37.72) U6.28 ; R37.1 v1(19.61,75.46)
ESP_UART2_TXD: length 2.8
  TOP w0.203: U6.29 30.28,38.39 v1(29.43,39.24)
ESP_WIFI_OFF: length 2.8
  TOP w0.203: U6.32 v1(29.33,34.87) ; v1(27.43,35.72) U6.31 ; v1(29.43,37.72) U6.30
I2C_SCL: length 0.9
  TOP w0.203: U6.34 v1(29.33,33.17)
I2C_SDA: length 2.8
  TOP w0.203: U6.33 30.01,34.02 v1(30.86,34.87)
Net_10: length 0.9
  TOP w0.203: 42.38,29.77 v1(41.43,29.77)
NRF_SWDCLK: length 0.9
  TOP w0.203: U6.12 v1(41.43,33.17)
NRF_SWDIO: length 2.8
  TOP w0.203: v1(39.91,33.17) 40.76,32.32 U6.11
PGM_D+: length 3.3
  TOP w0.203: U6.24 34.53,35.15 v1(35.38,34.3) ; J8.A6 J8.B7
PGM_D-: length 1.4
  TOP w0.203: J8.B6 J8.A7 ; v1(35.38,35.82) U6.23
POWER_D+: length 10.2
  TOP w0.203: J1.A6 J1.B7
  BOTTOM w0.203: U2.24 34.79,58.8 32.63,56.63 v1(31.06,56.63) R7.2 R9.1
POWER_D-: length 12.1
  TOP w0.203: J1.B6 J1.A7
  BOTTOM w0.203: R8.1 R6.2 28.65,56.44 28.91,56.69 v1(29.74,56.69) 30.48,57.43 32.59,57.43 34.63,59.47 35.45,59.47 U2.1
VLDO_3V3: length 4.4
  TOP w0.381: U5.8 53.08,59.87 C15.1
  TOP w0.508: R24.1 v1(50.22,49.78)
  vias: v1(51.64,60.71) v1(51.64,58.93)
VREGN_DIV: length 7.6
  TOP w0.203: v1(39.7,70.12) 39.7,69.19 R14.2 R15.1
  BOTTOM w0.203: v1(33.43,64.47) 34.52,63.37 35.84,63.37 36.14,63.07 U2.7
VSW_3V3: length 3.2
  BOTTOM w0.508: R4.1 v1(26.92,58.83) ; R5.1 v1(35.23,70.38)
VSW_4V0: length 22.8
  BOTTOM w0.203: U7.2 8.81,71.13 8.81,59.11 v1(15.32,52.6)
  vias: v1(16.84,52.6) v1(18.36,52.6)
VSW_5V0:
  vias: v1(38.79,14.33) v1(40.56,14.33)
VSYS: length 2.2
  BOTTOM w0.508: C16.1 50.06,58.98 50.11,59.03
  vias: v1(20.55,64.21) v1(20.55,62.64) v1(22.45,64.21) v1(39.12,63.86) v1(40.13,63.83)
VSYS_BC: length 8
  BOTTOM w0.254: C7.1 v1(41.35,61.49) 41.22,61.49 40.71,60.98 U2.15 U2.16 39.96,60.48 40.02,60.54 40.91,60.54 41.35,60.09 v1(41.35,59.39) C8.1
N489525: length 10.1
  BOTTOM w0.254: C4.2 38.3,57.3 38.2,57.4 ; 38.2,57.4 38.2,55.43 37.14,56.49 37.14,57.8 37.17,57.83 37.17,58.27 37.14,58.31 U2.22 U2.21 37.64,57.97 38.2,57.4
N489966: length 3.5
  BOTTOM w0.254: U2.18 39.32,59.08 39.65,58.75 ; U2.18 U2.17 40.25,59.98 40.41,59.82 ; U2.18 40.04,59.48 40.26,59.26
N490283: length 5.1
  BOTTOM w0.203: C5.2 v1(49.17,61.88) ; U2.12 39.83,62.67 41.25,64.08 v1(41.25,64.44)
N491328: length 5.7
  BOTTOM w0.203: R10.1 34.95,63.88 36.2,63.88 36.64,63.44 U2.8
N491337: length 4.8
  BOTTOM w0.203: U2.6 35.19,61.98 33.5,63.68 R11.1
N491346: length 3.4
  BOTTOM w0.203: R12.1 37.64,66.01 37.64,64.16 37.63,64.16 37.63,63.73 37.64,63.73 U2.10
N491858: length 6.8
  TOP w0.203: R14.1 38.76,64.69 v1(38.66,64.69)
  BOTTOM w0.203: U2.11 38.14,64.17 v1(38.66,64.69) 39.88,64.69 40.08,64.9 R14.1
N492759: length 4.5
  BOTTOM w0.203: U2.3 34.97,60.48 34.96,60.49 34.26,60.49 33.48,61.26 R13.1
N505904: length 3.3
  TOP w0.381: U3.1 R17.1
N533307: length 3.7
  BOTTOM w0.203: U9.4 41.01,9.15 40.38,9.78 U8.2
N533315: length 3.9
  BOTTOM w0.203: U10.4 46.17,15.79 45.57,15.19 U9.2
N536197: length 3.7
  BOTTOM w0.203: U11.4 39.81,21.02 40.41,20.42 U10.2
N742009: length 7
  BOTTOM w0.203: U13.2 9.55,43.31 D2.2 14.95,43.31 U12.3
N742588: length 3.2
  BOTTOM w0.203: R26.2 20.23,44.23 U12.1
N763037: length 3.2
  TOP w0.203: U7.5 R37.2
N763041: length 4.3
  TOP w0.203: R39.2 R42.2 U7.4
N763585: length 4.6
  TOP w0.203: U7.3 10.22,74.67 R43.2 R40.1

## Copper pours and planes (outline as drawn; the poured copper is in the pictures)
GND on TOP: 23.98,61.52 25.73,61.52 25.98,61.77 25.98,64.26 25.73,64.52 23.98,64.52 23.72,64.26 23.72,61.77
GND on TOP: 46.28,51.79 48.16,51.79 48.41,52.04 48.41,54.33 48.16,54.58 46.28,54.58 46.02,54.33 46.02,52.04
GND on TOP: 47.32,45.8 53.14,45.8 53.26,45.67 53.26,44.91 53.14,44.78 48.41,44.78 46.94,43.31 46.94,42.47 46.79,42.32 44.81,42.32 44.5,42.62 44.5,44.78 44.63,44.91 46.43,44.91
GND on TOP: 17.02,56.49 17.02,55.83 17.4,55.45 20.19,55.45 20.5,55.14 20.5,52.48 20.68,52.3 23.34,52.3 23.62,52.58 23.62,55.22 23.88,55.47 25.68,55.47 26.44,56.24 29.06,56.24 29.18,56.36 29.18,57.76 29.11,57.84 29.11,59.33 29.72,59.94 32.23,59.94 32.61,60.33 32.61,65.1 32.05,65.66 24.23,65.66 23.72,65.15 23.72,57.81 23.34,57.43 20.55,57.43 20.4,57.28 20.4,56.92 20.22,56.74 17.27,56.74
GND on TOP: 57.68,60.71 57.68,52.3 57.38,51.99 54.23,51.99 54.13,52.1 54.13,54.23 53.47,54.89 53.49,54.89 53.49,58.06 53.87,58.45 54.69,58.45 55.02,58.78 55.02,60.78 55.19,60.96 57.43,60.96
GND on TOP: 6.35,60.07 10.26,60.07 10.46,60.27 10.46,62.15 10.26,62.36 6.35,62.36 6.1,62.1 6.1,60.33
GND on TOP: 41.43,23.34 41.71,23.62 41.71,24.74 41.94,24.97 43.79,24.97 44.04,24.71 44.04,22.56 43.84,22.35 31.85,22.35 30.78,21.29 27.91,21.29 27.79,21.41 27.79,23.22 27.91,23.34 31.57,23.34 32.16,23.93 32.16,32.54 32.72,33.1 38.23,33.1 38.71,32.61 38.71,23.9 39.27,23.34
GND on TOP: 46.2,73.76 47.85,73.76 47.92,73.7 47.92,70.75 46.63,69.47 46.63,67.72 47.4,66.95 47.4,65.33 46.61,64.54 46.61,59.03 44.96,57.38 44.96,56.31 44.86,56.21 42.21,56.21 41.53,55.52 39.27,55.52 38.96,55.22 38.96,50.88 38.71,50.62 30.58,50.62 30.43,50.77 30.43,52.4 30.58,52.55 35.48,52.55 36.32,53.39 36.32,55.02 35.89,55.45 33.96,55.45 33.83,55.58 33.83,56.69 33.93,56.79 35.66,56.79 36.4,57.53 38.73,57.53 38.91,57.71 38.91,58.24 39.29,58.62 41.5,58.62 41.88,59 41.88,64.87 41.55,65.2 41.55,66.83 41.61,66.88 43.21,66.88 43.76,67.44 44.17,67.44 44.6,67.87 44.6,69.93 44.32,70.21 40.08,70.21 39.93,70.36 39.93,72.14 40.11,72.31 45.76,72.31 46.11,72.67 46.11,73.67
GND on TOP: 43.74,27.13 44.22,27.13 44.81,27.71 49.17,27.71 49.76,27.13 50.24,27.13 50.5,27.38 50.5,29.82 50.24,30.07 43.74,30.07 43.48,29.82 43.48,27.38
GND on BOTTOM: 45.95,72.31 37.24,72.31 36.65,71.73 36.65,68.02 36.78,67.89 43,67.89 43.64,67.26 43.64,58.62 43.79,58.47 45.75,58.47 45.97,58.7 45.97,63.63 47.47,65.13 47.47,70.87 47.9,71.3 47.9,73.74 47.83,73.81 46.33,73.81 46.18,73.66 46.18,72.54
GND on BOTTOM: 46.1,52.07 46.1,54.61 46.48,54.99 54.86,54.99 55.24,55.37 56.39,55.37 56.52,55.25 56.52,52.58 55.63,51.69 46.48,51.69
GND on BOTTOM: 27.18,53.34 27.18,50.8 27.05,50.67 25.4,50.67 25.27,50.8 25.27,53.34 25.4,53.47 27.05,53.47
GND on BOTTOM: 25.12,72.31 24.87,72.06 24.87,69.88 24.89,69.85 24.89,68.33 25.27,67.94 33.66,67.94 33.78,68.07 33.78,70.1 33.91,70.23 33.91,71.75 33.35,72.31
GND on BOTTOM: 29.59,8.61 29.34,8.86 29.34,10.9 29.59,11.15 33.15,11.15 33.78,10.52 35.05,10.52 35.18,10.39 35.18,9.12 34.67,8.61
GND on BOTTOM: 29.59,65.15 29.59,60.33 29.21,59.94 27.3,59.94 26.16,58.8 24.51,58.8 23.75,59.56 23.75,65.02 24.26,65.53 29.21,65.53
GND on BOTTOM: 32.51,53.21 32.51,50.93 32.89,50.55 39.24,50.55 39.5,50.8 39.5,53.34 39.37,53.47 32.77,53.47
VBAT on TOP: 13.69,64.39 13.69,66.42 13.87,66.6 17.17,66.6 17.42,66.34 17.42,64.44 17.22,64.24 13.84,64.24
VBUS on TOP: 45.91,78.36 45.91,75.74 45.32,75.16 42.56,75.16 42.4,75.01 42.4,74.68 42.2,74.47 42.2,74.04 42.4,73.84 42.4,73.46 42.51,73.36 44.44,73.36 45.22,74.14 49.67,74.14 49.97,74.45 49.97,75.34 49.72,75.59 47.1,75.59 46.54,76.15 46.54,78.38 46.52,78.41 45.96,78.41
VBUS on BOTTOM: 32.03,53.34 32.03,50.22 31.6,49.78 28.17,49.78 27.64,50.32 27.64,53.31 27.79,53.47 31.9,53.47
VBUS_USB2 on TOP: 29.72,78.36 29.72,75.74 29.13,75.16 26.37,75.16 26.21,75.01 26.21,74.68 26.01,74.47 26.01,74.04 26.21,73.84 26.21,73.46 26.31,73.36 28.24,73.36 28.27,73.38 30.2,73.38 30.71,73.89 30.71,75.79 30.35,76.15 30.35,78.38 30.33,78.41 29.77,78.41
ESP_EN_4V0 on TOP: 19.68,58.78 19.68,57.33 19.58,57.23 16.94,57.23 16.74,57.02 14.81,57.02 14.68,57.15 14.68,58.75 14.81,58.88 19.58,58.88
ESP_EN_5V0 on TOP: 35.36,58.75 35.36,57.38 35.31,57.33 32.72,57.33 32.49,57.1 30.51,57.1 30.43,57.18 30.43,58.75 30.56,58.88 35.23,58.88
VLDO_3V3 on TOP: 53.78,61.13 54,60.91 54,59.11 53.31,58.42 53.31,56.44 53.16,56.29 51.46,56.29 51.33,56.41 51.33,60.92 51.54,61.13
VSW_4V0 on TOP: 6.86,72.59 6.86,70.43 6.83,70.43 6.71,70.31 5.03,70.31 4.93,70.21 4.93,68.35 5.08,68.2 8.1,68.2 8.53,68.63 8.53,72.72 8.23,73.03 7.29,73.03
VSW_4V0 on TOP: 14.88,55.14 14.88,52.48 15.06,52.3 19.35,52.3 19.63,52.58 19.63,54.86 19.56,54.94 17.12,54.94 16.74,55.32 15.06,55.32
VSW_5V0 on TOP: 38.48,13.92 40.72,13.92 40.97,14.17 40.97,14.63 40.08,15.52 40.08,17.12 39.9,17.3 38.48,17.3 38.23,17.04 38.23,14.17
VSW_5V0 on BOTTOM: 42.9,15.62 42.9,12.83 42.55,12.47 38.07,12.47 37.82,12.73 37.82,17.46 38.13,17.77 42.24,17.77 42.42,17.59 42.42,16.1
VSYS on TOP: 38.43,59.31 38.43,58.62 38.18,58.37 37.13,58.37 37.01,58.5 37.01,59.94 37.13,60.07 37.59,60.07 38.89,61.37 38.89,63.45 38.76,63.58 38.76,63.93 39.01,64.19 40.46,64.19 40.64,64.01 40.67,64.01 40.67,60.22 39.88,59.44 38.56,59.44
VSYS on TOP: 20.85,61.29 20.85,58.55 21.06,58.34 22.56,58.34 22.78,58.57 22.78,64.36 22.61,64.54 20.45,64.54 20.22,64.31 20.22,61.93
VSYS_BC on TOP: 47.93,62.43 47.57,62.79 47.57,64.72 48.25,65.39 55.88,65.39 56.08,65.19 56.08,62.59 55.93,62.43
VSYS_BC on BOTTOM: 43.23,62.28 43.23,58.6 43.15,58.52 41.61,58.52 41.02,59.11 41.02,60.05 40.82,60.25 40.82,61.65 41.45,62.28
N489525 on BOTTOM: 36.93,58.01 37.08,58.17 37.8,58.17 38.61,57.35 39.24,57.35 40.92,55.68 40.92,52.65 41.71,51.87 45.06,51.87 45.24,51.69 45.24,49.2 45.14,49.1 40.64,49.1 39.88,49.86 39.88,53.97 39.42,54.43 37.39,54.43 37.24,54.58 37.24,56.18 36.93,56.49
N489966 on BOTTOM: 48.56,59.92 48.56,56.59 48.01,56.03 46.28,56.03 45.29,55.04 41.73,55.04 41.48,55.3 41.48,56.08 39.42,58.14 39.42,60.02 39.47,60.07 40.44,60.07 40.79,59.72 40.79,58.8 42.06,57.53 46,57.53 46.56,58.09 46.56,59.84 46.71,59.99 48.49,59.99
N503956 on TOP: 53.64,54.03 53.95,53.72 53.95,51.71 53.72,51.49 49.48,51.49 49.3,51.66 49.3,53.87 49.45,54.03
N505816 on TOP: 24.18,54.91 26.72,54.91 26.95,55.14 29.06,55.14 29.13,55.07 29.13,53.49 29.01,53.37 24.33,53.37 24.08,53.62 24.08,54.81
N633379 on TOP: 14.68,63.32 14.68,62.18 14.05,61.54 14.05,59.87 13.92,59.74 12.06,59.74 11.99,59.82 11.99,61.67 13.74,63.42 14.58,63.42
N633403 on TOP: 6.12,63.4 6.12,64.64 6.43,64.95 12.52,64.95 12.7,64.77 12.7,63.42 12.5,63.22 6.3,63.22
N763595 on TOP: 9.4,52.12 9.4,49.76 9.65,49.5 10.87,49.5 11.25,49.89 11.25,53.97 11.13,54.1 8.1,54.1 7.9,53.9 7.9,52.5 8.08,52.32 9.19,52.32

## Text on the board
Package Geometry/Pastemask Bottom: /PASTEMASK_BOTTOM
Ref Des/Silkscreen Bottom: /SILKSCREEN_BOTTOM
Board Geometry/Soldermask Top: /SOLDER_MASK_TOP
Board Geometry/Design Outline: CT1307-BD01-01
DIMENSION: /ASSEMBLY_TOP
PLACE_BOUND_BOTTOM: /FAB_DRAWING | 2.TWO LAYER, 1.6 MM PCB THICKNESS, NO IMPEDANCE CONTROL | NOTES: | 1.BOARD DIMENSIONS ARE IN MM
PLACE_BOUND_TOP: LAYER 2 - BOTTOM | LAYER 1 - TOP | BOTTOM SILKSCREEN | TOP SILKSCREEN | BOTTOM SOLDERMASK | TOP SOLDERMASK | CORE | 1.Specifications: | 1.0 Producibility study- it is the responsibility of the supplier to conduct | 1.1 This drawing is to be used in conjuction with the provided gerber and | 2.Material: | 2.0 NEMA Grade FR-4/Epoxy class , foil lamination structure for core and | 2.1 Color is vendor's option. | 3.Soldermask: | 3.0 Soldermask both sides with (green color) liquid photoimageble soldermask | 4. Drilling: | 4.0 All hole diameters are finished sizes. | 4.1 All holes to be +/- .003 from the true postion unless otherwise specified. | 4.2 All holes diameters to be +/- .003 unless otherwise specified. | 4.3 An CNC drill file has been supplied - see drill table. | 5.Finish: | 5.0 Plate thru with copper .0010 min to .002 max thickness drill size. | 5.1 Finished boardsshall not have nicks, scratches, voids, exposed copper, | 5.2 If applicable, Gold plat edge fingers over low stress nickel: | 6.Silkscreen: | 6.0 Silksceen using white non-conductive epoxy or equivalent ( both sides ). | 6.1 No Silkscreen allowed on exposed lands or in holes (burnout with soldermask) | 6.2 Minimum clearance between silkscreen legend and vias, pads or holes , to be | 6.3 Registration to be +/- .005 and must pass peel test. | 7.Electrical Test: | 7.0 All boards shall be 100% elecrically tested for open/shorts. | 7.1 Apply test stamp in non legend area on the solder side of PCB. | 10.Bow and Twist: | 10.0 Bow and twist to be .007 IN/IN or .090 max according to IPC-A-600K. | 11.Inspection: | 11.0 Automatic optical inspection of all layers is required. | 12.0 Test coupons need to be provided. | 12.1 Add the Auto serial number in the area provided near "SL/NO" | 13.0 Surface finish ENIG | 8.Cleanlines: | 8.0 Boards shall be free of fiber glass dust or any other forgien material. | 8.1 Finished boards must conform to 0.01 MG/IN max NAcl ionic contamonation | 9.Packaging: | 9.0 There shall be max of 25 units per package wrapped in sulpher and silicon | NOTES: | thorough review of the artwork and media for manufacturablity in the | supplier's process compliance to all applicable specifications. The | customer must be advised in writing (inadvance of manufacturing) of any | changes, revisions, or corrections made or recommendations to ensure | conformance to the customers standards, and of any specifications that | cannot met. | drill data when applicable. | copper thickness: type GFN, Grade A, Class 1, Class A. | .003 max. thickness. Soldermask over bare copper. | dimensions apply after plating. | Minimum gold thickness : .00003 | Maximum nickel thickness: .0005 | .005. | poor plating, or misdrilled holes. | free material and contained in heavy cardboard cartons with sufficient | surrounding material to prevent shipping damage. | as measured bu omega meter 600SMD. | MM is two numeric month and XXX is three numeric running serial number. | in the format of "YYMMXXX"where YY is two numeric year | STACKUP INFO :
USER_PART_NUM_TOP: /L01_TOP
COMPVAL_TYPE_TOP: /L02_BOTTOM
TOLERANCE_TOP: /SILKSCREEN_TOP
DISPLAY_TOP: /SOLDER_MASK_BOTTOM
User.10: /SOLDER_PASTE_TOP
User.15: FIGURE | SIZE | 12.0 | 47.0 | 106.299 | 126.0 | DRILL CHART: TOP to BOTTOM | ALL UNITS ARE IN MILS | PLATED | QTY | 58 | 40 | 4
